# Altium PCB PCB1.PcbDoc (part 3 of 3)
Units mm, origin at the board's own origin, x right, y up, seen from the top; angles counter-clockwise.
Board outline 72.9 x 52.07 mm, 2 copper layers (Top Layer, Bottom Layer); 22 components, 35 nets, 99 pads, 0 vias.
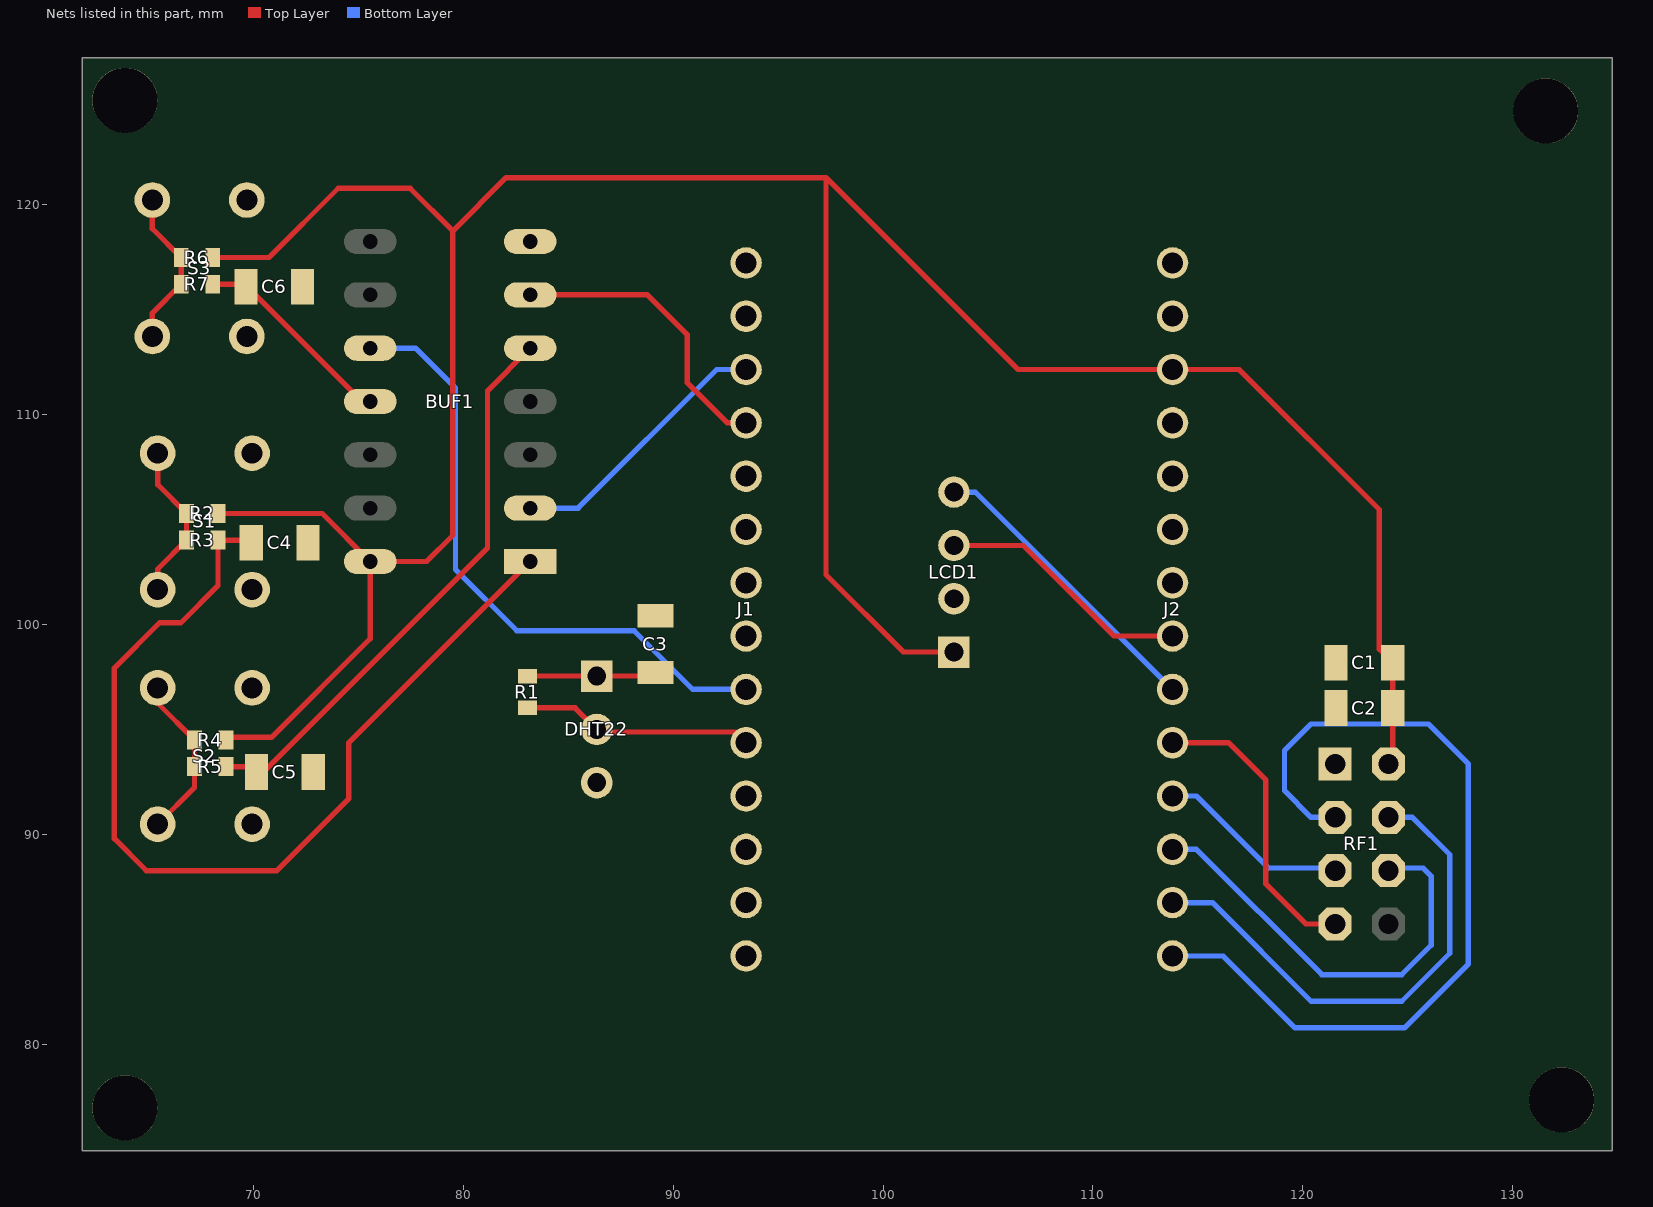
[diagram p3: the nets of this part, all layers, seen from the top]

## Footprints (in the part's own frame and the unit in brackets; to place one, negate y for a bottom-side part, rotate by r counter-clockwise, add the part's x,y. Pads: shape width x height; smd on the part's side, far side on the other; paste and mask are expansions set on the pad) (continued)
STRIP-14 [mm] (continued)
  Bottom Layer region: 0.152,11.087 0.454,11.027 0.709,10.856 0.88,10.601 0.94,10.3 0.94,10.3 0.94,10.274 0.88,9.973 0.709,9.718 0.454,9.547 0.152,9.487 0.152,9.487 -0.152,9.487 -0.343,9.512 -0.533,9.588 -0.699,9.703 -0.699,9.931 -0.714,10.009 -0.758,10.075 -0.824,10.119 -0.902,10.135 -0.902,10.135 -0.953,10.135 -0.953,9.538 -1.003,9.487 -1.854,9.487 -1.905,9.538 -1.905,11.036 -1.854,11.087 -1.003,11.087 -0.953,11.036 -0.953,10.439 -0.902,10.439 -0.824,10.455 -0.758,10.499 -0.714,10.565 -0.699,10.643 -0.699,10.643 -0.699,10.871 -0.533,10.986 -0.343,11.049 -0.152,11.087
  Bottom Layer region: 0.152,11.087 0.454,11.027 0.709,10.856 0.88,10.601 0.94,10.3 0.94,10.3 0.94,10.274 0.88,9.973 0.709,9.718 0.454,9.547 0.152,9.487 0.152,9.487 -0.152,9.487 -0.343,9.512 -0.533,9.588 -0.699,9.703 -0.699,9.931 -0.714,10.009 -0.758,10.075 -0.824,10.119 -0.902,10.135 -0.902,10.135 -0.953,10.135 -0.953,9.538 -1.003,9.487 -1.854,9.487 -1.905,9.538 -1.905,11.036 -1.854,11.087 -1.003,11.087 -0.953,11.036 -0.953,10.439 -0.902,10.439 -0.824,10.455 -0.758,10.499 -0.714,10.565 -0.699,10.643 -0.699,10.643 -0.699,10.871 -0.533,10.986 -0.343,11.049 -0.152,11.087
  Bottom Layer region: 0.152,11.087 0.454,11.027 0.709,10.856 0.88,10.601 0.94,10.3 0.94,10.3 0.94,10.274 0.88,9.973 0.709,9.718 0.454,9.547 0.152,9.487 0.152,9.487 -0.152,9.487 -0.343,9.512 -0.533,9.588 -0.699,9.703 -0.699,9.931 -0.714,10.009 -0.758,10.075 -0.824,10.119 -0.902,10.135 -0.902,10.135 -0.953,10.135 -0.953,9.538 -1.003,9.487 -1.854,9.487 -1.905,9.538 -1.905,11.036 -1.854,11.087 -1.003,11.087 -0.953,11.036 -0.953,10.439 -0.902,10.439 -0.824,10.455 -0.758,10.499 -0.714,10.565 -0.699,10.643 -0.699,10.643 -0.699,10.871 -0.533,10.986 -0.343,11.049 -0.152,11.087
  Bottom Layer region: 0.152,13.627 0.454,13.567 0.709,13.396 0.88,13.141 0.94,12.84 0.94,12.84 0.94,12.814 0.88,12.513 0.709,12.258 0.454,12.087 0.152,12.027 0.152,12.027 -0.152,12.027 -0.343,12.052 -0.533,12.128 -0.699,12.243 -0.699,12.471 -0.714,12.549 -0.758,12.615 -0.824,12.659 -0.902,12.675 -0.902,12.675 -0.953,12.675 -0.953,12.078 -1.003,12.027 -1.854,12.027 -1.905,12.078 -1.905,13.576 -1.854,13.627 -1.003,13.627 -0.953,13.576 -0.953,12.979 -0.902,12.979 -0.824,12.995 -0.758,13.039 -0.714,13.105 -0.699,13.183 -0.699,13.183 -0.699,13.411 -0.533,13.525 -0.343,13.589 -0.152,13.627
  Bottom Layer region: 0.152,13.627 0.454,13.567 0.709,13.396 0.88,13.141 0.94,12.84 0.94,12.84 0.94,12.814 0.88,12.513 0.709,12.258 0.454,12.087 0.152,12.027 0.152,12.027 -0.152,12.027 -0.343,12.052 -0.533,12.128 -0.699,12.243 -0.699,12.471 -0.714,12.549 -0.758,12.615 -0.824,12.659 -0.902,12.675 -0.902,12.675 -0.953,12.675 -0.953,12.078 -1.003,12.027 -1.854,12.027 -1.905,12.078 -1.905,13.576 -1.854,13.627 -1.003,13.627 -0.953,13.576 -0.953,12.979 -0.902,12.979 -0.824,12.995 -0.758,13.039 -0.714,13.105 -0.699,13.183 -0.699,13.183 -0.699,13.411 -0.533,13.525 -0.343,13.589 -0.152,13.627
  Bottom Layer region: 0.152,13.627 0.454,13.567 0.709,13.396 0.88,13.141 0.94,12.84 0.94,12.84 0.94,12.814 0.88,12.513 0.709,12.258 0.454,12.087 0.152,12.027 0.152,12.027 -0.152,12.027 -0.343,12.052 -0.533,12.128 -0.699,12.243 -0.699,12.471 -0.714,12.549 -0.758,12.615 -0.824,12.659 -0.902,12.675 -0.902,12.675 -0.953,12.675 -0.953,12.078 -1.003,12.027 -1.854,12.027 -1.905,12.078 -1.905,13.576 -1.854,13.627 -1.003,13.627 -0.953,13.576 -0.953,12.979 -0.902,12.979 -0.824,12.995 -0.758,13.039 -0.714,13.105 -0.699,13.183 -0.699,13.183 -0.699,13.411 -0.533,13.525 -0.343,13.589 -0.152,13.627
  Bottom Layer region: 0.152,13.627 0.454,13.567 0.709,13.396 0.88,13.141 0.94,12.84 0.94,12.84 0.94,12.814 0.88,12.513 0.709,12.258 0.454,12.087 0.152,12.027 0.152,12.027 -0.152,12.027 -0.343,12.052 -0.533,12.128 -0.699,12.243 -0.699,12.471 -0.714,12.549 -0.758,12.615 -0.824,12.659 -0.902,12.675 -0.902,12.675 -0.953,12.675 -0.953,12.078 -1.003,12.027 -1.854,12.027 -1.905,12.078 -1.905,13.576 -1.854,13.627 -1.003,13.627 -0.953,13.576 -0.953,12.979 -0.902,12.979 -0.824,12.995 -0.758,13.039 -0.714,13.105 -0.699,13.183 -0.699,13.183 -0.699,13.411 -0.533,13.525 -0.343,13.589 -0.152,13.627
  Bottom Layer region: 0.152,13.627 0.454,13.567 0.709,13.396 0.88,13.141 0.94,12.84 0.94,12.84 0.94,12.814 0.88,12.513 0.709,12.258 0.454,12.087 0.152,12.027 0.152,12.027 -0.152,12.027 -0.343,12.052 -0.533,12.128 -0.699,12.243 -0.699,12.471 -0.714,12.549 -0.758,12.615 -0.824,12.659 -0.902,12.675 -0.902,12.675 -0.953,12.675 -0.953,12.078 -1.003,12.027 -1.854,12.027 -1.905,12.078 -1.905,13.576 -1.854,13.627 -1.003,13.627 -0.953,13.576 -0.953,12.979 -0.902,12.979 -0.824,12.995 -0.758,13.039 -0.714,13.105 -0.699,13.183 -0.699,13.183 -0.699,13.411 -0.533,13.525 -0.343,13.589 -0.152,13.627
  Bottom Layer region: 0.152,13.627 0.454,13.567 0.709,13.396 0.88,13.141 0.94,12.84 0.94,12.84 0.94,12.814 0.88,12.513 0.709,12.258 0.454,12.087 0.152,12.027 0.152,12.027 -0.152,12.027 -0.343,12.052 -0.533,12.128 -0.699,12.243 -0.699,12.471 -0.714,12.549 -0.758,12.615 -0.824,12.659 -0.902,12.675 -0.902,12.675 -0.953,12.675 -0.953,12.078 -1.003,12.027 -1.854,12.027 -1.905,12.078 -1.905,13.576 -1.854,13.627 -1.003,13.627 -0.953,13.576 -0.953,12.979 -0.902,12.979 -0.824,12.995 -0.758,13.039 -0.714,13.105 -0.699,13.183 -0.699,13.183 -0.699,13.411 -0.533,13.525 -0.343,13.589 -0.152,13.627
  Bottom Layer region: 0.152,13.627 0.454,13.567 0.709,13.396 0.88,13.141 0.94,12.84 0.94,12.84 0.94,12.814 0.88,12.513 0.709,12.258 0.454,12.087 0.152,12.027 0.152,12.027 -0.152,12.027 -0.343,12.052 -0.533,12.128 -0.699,12.243 -0.699,12.471 -0.714,12.549 -0.758,12.615 -0.824,12.659 -0.902,12.675 -0.902,12.675 -0.953,12.675 -0.953,12.078 -1.003,12.027 -1.854,12.027 -1.905,12.078 -1.905,13.576 -1.854,13.627 -1.003,13.627 -0.953,13.576 -0.953,12.979 -0.902,12.979 -0.824,12.995 -0.758,13.039 -0.714,13.105 -0.699,13.183 -0.699,13.183 -0.699,13.411 -0.533,13.525 -0.343,13.589 -0.152,13.627
  Bottom Layer region: 0.152,16.167 0.454,16.107 0.709,15.936 0.88,15.681 0.94,15.38 0.94,15.38 0.94,15.354 0.88,15.053 0.709,14.798 0.454,14.627 0.152,14.567 0.152,14.567 -0.152,14.567 -0.343,14.592 -0.533,14.668 -0.699,14.783 -0.699,15.011 -0.714,15.089 -0.758,15.155 -0.824,15.199 -0.902,15.215 -0.902,15.215 -0.953,15.215 -0.953,14.618 -1.003,14.567 -1.854,14.567 -1.905,14.618 -1.905,16.116 -1.854,16.167 -1.003,16.167 -0.953,16.116 -0.953,15.519 -0.902,15.519 -0.824,15.535 -0.758,15.579 -0.714,15.645 -0.699,15.723 -0.699,15.723 -0.699,15.951 -0.533,16.066 -0.343,16.129 -0.152,16.167
  Bottom Layer region: 0.152,16.167 0.454,16.107 0.709,15.936 0.88,15.681 0.94,15.38 0.94,15.38 0.94,15.354 0.88,15.053 0.709,14.798 0.454,14.627 0.152,14.567 0.152,14.567 -0.152,14.567 -0.343,14.592 -0.533,14.668 -0.699,14.783 -0.699,15.011 -0.714,15.089 -0.758,15.155 -0.824,15.199 -0.902,15.215 -0.902,15.215 -0.953,15.215 -0.953,14.618 -1.003,14.567 -1.854,14.567 -1.905,14.618 -1.905,16.116 -1.854,16.167 -1.003,16.167 -0.953,16.116 -0.953,15.519 -0.902,15.519 -0.824,15.535 -0.758,15.579 -0.714,15.645 -0.699,15.723 -0.699,15.723 -0.699,15.951 -0.533,16.066 -0.343,16.129 -0.152,16.167
  Bottom Layer region: 0.152,16.167 0.454,16.107 0.709,15.936 0.88,15.681 0.94,15.38 0.94,15.38 0.94,15.354 0.88,15.053 0.709,14.798 0.454,14.627 0.152,14.567 0.152,14.567 -0.152,14.567 -0.343,14.592 -0.533,14.668 -0.699,14.783 -0.699,15.011 -0.714,15.089 -0.758,15.155 -0.824,15.199 -0.902,15.215 -0.902,15.215 -0.953,15.215 -0.953,14.618 -1.003,14.567 -1.854,14.567 -1.905,14.618 -1.905,16.116 -1.854,16.167 -1.003,16.167 -0.953,16.116 -0.953,15.519 -0.902,15.519 -0.824,15.535 -0.758,15.579 -0.714,15.645 -0.699,15.723 -0.699,15.723 -0.699,15.951 -0.533,16.066 -0.343,16.129 -0.152,16.167
  Bottom Layer region: 0.152,16.167 0.454,16.107 0.709,15.936 0.88,15.681 0.94,15.38 0.94,15.38 0.94,15.354 0.88,15.053 0.709,14.798 0.454,14.627 0.152,14.567 0.152,14.567 -0.152,14.567 -0.343,14.592 -0.533,14.668 -0.699,14.783 -0.699,15.011 -0.714,15.089 -0.758,15.155 -0.824,15.199 -0.902,15.215 -0.902,15.215 -0.953,15.215 -0.953,14.618 -1.003,14.567 -1.854,14.567 -1.905,14.618 -1.905,16.116 -1.854,16.167 -1.003,16.167 -0.953,16.116 -0.953,15.519 -0.902,15.519 -0.824,15.535 -0.758,15.579 -0.714,15.645 -0.699,15.723 -0.699,15.723 -0.699,15.951 -0.533,16.066 -0.343,16.129 -0.152,16.167
  Bottom Layer region: 0.152,16.167 0.454,16.107 0.709,15.936 0.88,15.681 0.94,15.38 0.94,15.38 0.94,15.354 0.88,15.053 0.709,14.798 0.454,14.627 0.152,14.567 0.152,14.567 -0.152,14.567 -0.343,14.592 -0.533,14.668 -0.699,14.783 -0.699,15.011 -0.714,15.089 -0.758,15.155 -0.824,15.199 -0.902,15.215 -0.902,15.215 -0.953,15.215 -0.953,14.618 -1.003,14.567 -1.854,14.567 -1.905,14.618 -1.905,16.116 -1.854,16.167 -1.003,16.167 -0.953,16.116 -0.953,15.519 -0.902,15.519 -0.824,15.535 -0.758,15.579 -0.714,15.645 -0.699,15.723 -0.699,15.723 -0.699,15.951 -0.533,16.066 -0.343,16.129 -0.152,16.167
  Bottom Layer region: 0.152,16.167 0.454,16.107 0.709,15.936 0.88,15.681 0.94,15.38 0.94,15.38 0.94,15.354 0.88,15.053 0.709,14.798 0.454,14.627 0.152,14.567 0.152,14.567 -0.152,14.567 -0.343,14.592 -0.533,14.668 -0.699,14.783 -0.699,15.011 -0.714,15.089 -0.758,15.155 -0.824,15.199 -0.902,15.215 -0.902,15.215 -0.953,15.215 -0.953,14.618 -1.003,14.567 -1.854,14.567 -1.905,14.618 -1.905,16.116 -1.854,16.167 -1.003,16.167 -0.953,16.116 -0.953,15.519 -0.902,15.519 -0.824,15.535 -0.758,15.579 -0.714,15.645 -0.699,15.723 -0.699,15.723 -0.699,15.951 -0.533,16.066 -0.343,16.129 -0.152,16.167
  Bottom Layer region: 0.152,16.167 0.454,16.107 0.709,15.936 0.88,15.681 0.94,15.38 0.94,15.38 0.94,15.354 0.88,15.053 0.709,14.798 0.454,14.627 0.152,14.567 0.152,14.567 -0.152,14.567 -0.343,14.592 -0.533,14.668 -0.699,14.783 -0.699,15.011 -0.714,15.089 -0.758,15.155 -0.824,15.199 -0.902,15.215 -0.902,15.215 -0.953,15.215 -0.953,14.618 -1.003,14.567 -1.854,14.567 -1.905,14.618 -1.905,16.116 -1.854,16.167 -1.003,16.167 -0.953,16.116 -0.953,15.519 -0.902,15.519 -0.824,15.535 -0.758,15.579 -0.714,15.645 -0.699,15.723 -0.699,15.723 -0.699,15.951 -0.533,16.066 -0.343,16.129 -0.152,16.167
  Bottom Layer region: 0.953,18.707 -0.699,18.707 -0.699,18.263 -0.714,18.185 -0.758,18.119 -0.824,18.075 -0.902,18.059 -0.902,18.059 -0.953,18.059 -0.953,18.656 -1.003,18.707 -1.854,18.707 -1.905,18.656 -1.905,17.158 -1.854,17.107 -1.003,17.107 -0.953,17.158 -0.953,17.755 -0.902,17.755 -0.824,17.739 -0.758,17.695 -0.714,17.629 -0.699,17.551 -0.699,17.551 -0.699,17.107 0.953,17.107

## Part data
C1 C2 C3 C4 C5 C6: "Capacitor (Semiconductor SIM Model)"
DHT22: "Header, 3-Pin"
LCD1: "Header, 4-Pin"
R1 R2 R3 R4 R5 R6 R7: "Resistor"
RF1: library part PINHD-2X4
S1 S2 S3: "Switch"

## Free pads (board coordinates)
  round 3.1 hole 3.1: 2(63.881,76.962) 2(63.881,124.968) 2(131.572,124.46) 2(132.334,77.343)

## Nets (pads, with @x,y where several pads share a name; then routed paths per layer and width w, separated by ;. In a path a pad name is that pad's centre, name@x,y a point inside that pad or via, vN(x,y) a via of type N, cw(c..) or ccw(c..) an arc to the next point about the centre after c; other vN are vias at no path point)
+3V3: BUF1.14 C1.1 C2.1 J2.12 LCD1.1 R2.2 R4.2 R6.2 RF1.2 | length 143.9
  Top Layer w0.254: R6.2@68.06,117.475 70.739,117.475 74.041,120.777 77.47,120.777 79.502,118.745 ; R2.2@68.314,105.283 73.279,105.283 BUF1.14@75.565,102.997 BUF1.14@75.565,102.743 ; R4.2@68.695,94.488 68.822,94.615 70.866,94.615 75.565,99.314 BUF1.14@75.565,102.743 ; LCD1.1@103.378,98.679 100.965,98.679 97.282,102.362 97.282,121.285 ; RF1.2@124.286,93.552 C2.1@124.286,96.012 C1.1@124.286,98.171 123.64,98.817 123.64,105.468 116.967,112.141 J2.12@113.792,112.141 106.426,112.141 97.282,121.285 ; BUF1.14@75.565,102.743 75.819,102.997 78.252,102.997 79.502,104.247 79.502,118.745 ; 79.502,118.745 82.042,121.285 97.282,121.285
+5V: J2.14
A1: BUF1.2 J1.3 | length 13
  Bottom Layer w0.254: BUF1.2@83.185,105.537 85.471,105.537 92.075,112.141 J1.3@93.472,112.141
A2: BUF1.6 J1.4 | length 14.2
  Top Layer w0.254: BUF1.6@83.185,115.697 88.773,115.697 90.678,113.792 90.678,111.506 92.583,109.601 J1.4@93.472,109.601
A3: J1.5
A4: J1.6
A5: J1.7
A6: J1.8
AREF: J1.1
D0: BUF1.10 J1.9 | length 29.7
  Bottom Layer w0.254: BUF1.10@75.565,113.157 77.724,113.157 79.629,111.252 79.629,102.616 82.55,99.695 88.138,99.695 90.932,96.901 J1.9@93.472,96.901
D1: DHT22.2 J1.10 R1.1 | length 11.1
  Top Layer w0.254: R1.1@83.058,96.024 85.332,96.024 DHT22.2@86.36,94.996 ; DHT22.2@86.36,94.869 92.964,94.869 J1.10@93.472,94.361
D2: J1.11
D3: J1.12
D4: J1.13
D5: J1.14
D6: J2.1 RF1.3 | length 41.2
  Bottom Layer w0.254: J2.1@113.792,84.201 116.205,84.201 119.634,80.772 124.841,80.772 127.889,83.82 127.889,93.345 125.984,95.25 120.396,95.25 119.126,93.98 119.126,92.075 120.396,90.805 RF1.3@121.539,90.805
D7: J2.2 RF1.4 | length 24.5
  Bottom Layer w0.254: J2.2@113.792,86.741 115.697,86.741 120.396,82.042 124.714,82.042 127,84.328 127,89.027 125.222,90.805 RF1.4@124.079,90.805
D8/MOSI: J2.3 RF1.6 | length 20.9
  Bottom Layer w0.254: J2.3@113.792,89.281 114.935,89.281 120.904,83.312 124.714,83.312 126.111,84.709 126.111,88.011 125.73,88.392 124.206,88.392 RF1.6@124.079,88.265
D9/SCK: J2.4 RF1.5 | length 9.2
  Bottom Layer w0.254: J2.4@113.792,91.821 114.935,91.821 118.364,88.392 121.412,88.392 RF1.5@121.539,88.265
D10/MISO: J2.5 RF1.7 | length 14.2
  Top Layer w0.254: J2.5@113.792,94.361 116.459,94.361 118.237,92.583 118.237,87.63 120.142,85.725 RF1.7@121.539,85.725
D11/SDA: J2.6 LCD1.4 | length 14.3
  Bottom Layer w0.254: LCD1.4@103.378,106.299 104.394,106.299 J2.6@113.792,96.901
D12/SCL: J2.7 LCD1.3 | length 12.2
  Top Layer w0.254: LCD1.3@103.378,103.759 106.68,103.759 110.998,99.441 J2.7@113.792,99.441
D13/RX: J2.8
D14/TX: J2.9
DAC0/A0: J1.2
GND: BUF1.7 C1.2 C2.2 C3.1 C4.1 C5.1 C6.1 DHT22.3 J2.11 LCD1.2 pad.2 RF1.1 S1.1 S2.1 S3.1
NetC3_2: C3.2 DHT22.1 R1.2 | length 5.3
  Top Layer w0.254: R1.2@83.07,97.536 DHT22.1@86.36,97.536 C3.2@88.327,97.536
NetR2_1: R2.1 R3.2 S1.2 | length 7.6
  Top Layer w0.254: S1.2@65.441,101.652 65.441,102.64 R3.2@66.814,104.013 R2.1@66.814,105.283 65.441,106.656 S1.2@65.441,108.152
NetR4_1: R4.1 R5.2 S2.2 | length 8
  Top Layer w0.254: S2.2@65.441,90.476 67.195,92.23 R5.2@67.195,93.218 R4.1@67.195,94.488 65.441,96.242 S2.2@65.441,96.976
NetR6_1: R6.1 R7.2 S3.2 | length 7.6
  Top Layer w0.254: S3.2@65.187,113.717 65.187,114.832 R7.2@66.56,116.205 R6.1@66.56,117.475 65.187,118.848 S3.2@65.187,120.217
RESET: J2.10
SW1: BUF1.1 C4.2 R3.1 | length 46.4
  Top Layer w0.254: C4.2@69.77,104.013 R3.1@68.314,104.013 68.314,101.842 66.548,100.076 65.532,100.076 63.373,97.917 63.373,89.789 64.897,88.265 71.12,88.265 74.549,91.694 74.549,94.361 BUF1.1@83.185,102.997
SW2: BUF1.5 C5.2 R5.1 | length 27.3
  Top Layer w0.254: R5.1@68.695,93.218 69.897,93.218 C5.2@70.151,92.964 70.485,92.964 81.153,103.632 81.153,111.125 BUF1.5@83.185,113.157
SW3: BUF1.11 C6.2 R7.1 | length 9.3
  Top Layer w0.254: R7.1@68.06,116.205 C6.2@69.516,116.205 ; C6.2@69.643,116.078 69.723,116.078 BUF1.11@75.184,110.617
VIN: J2.13
pads on no net: BUF1.3 BUF1.4 BUF1.8 BUF1.9 BUF1.12 BUF1.13 RF1.8

## Polygon pours and split planes (outlines as drawn)
GND on Top Layer "GND_L01_P000" (solid, pour order 0): 61.849,127 134.62,127 134.62,74.93 61.849,74.93
GND on Bottom Layer "GND_L02_P002" (solid, pour order 2): 61.722,127 134.493,127 134.493,74.93 61.722,74.93